# Altium PCB FamicomTwin.PcbDoc
Units mil, origin at the board's own origin, x right, y up, seen from the top; angles counter-clockwise.
Board outline 2200 x 1525 mil, 2 copper layers (Top Layer, Bottom Layer); 2 components, 36 nets, 80 pads, 0 vias.
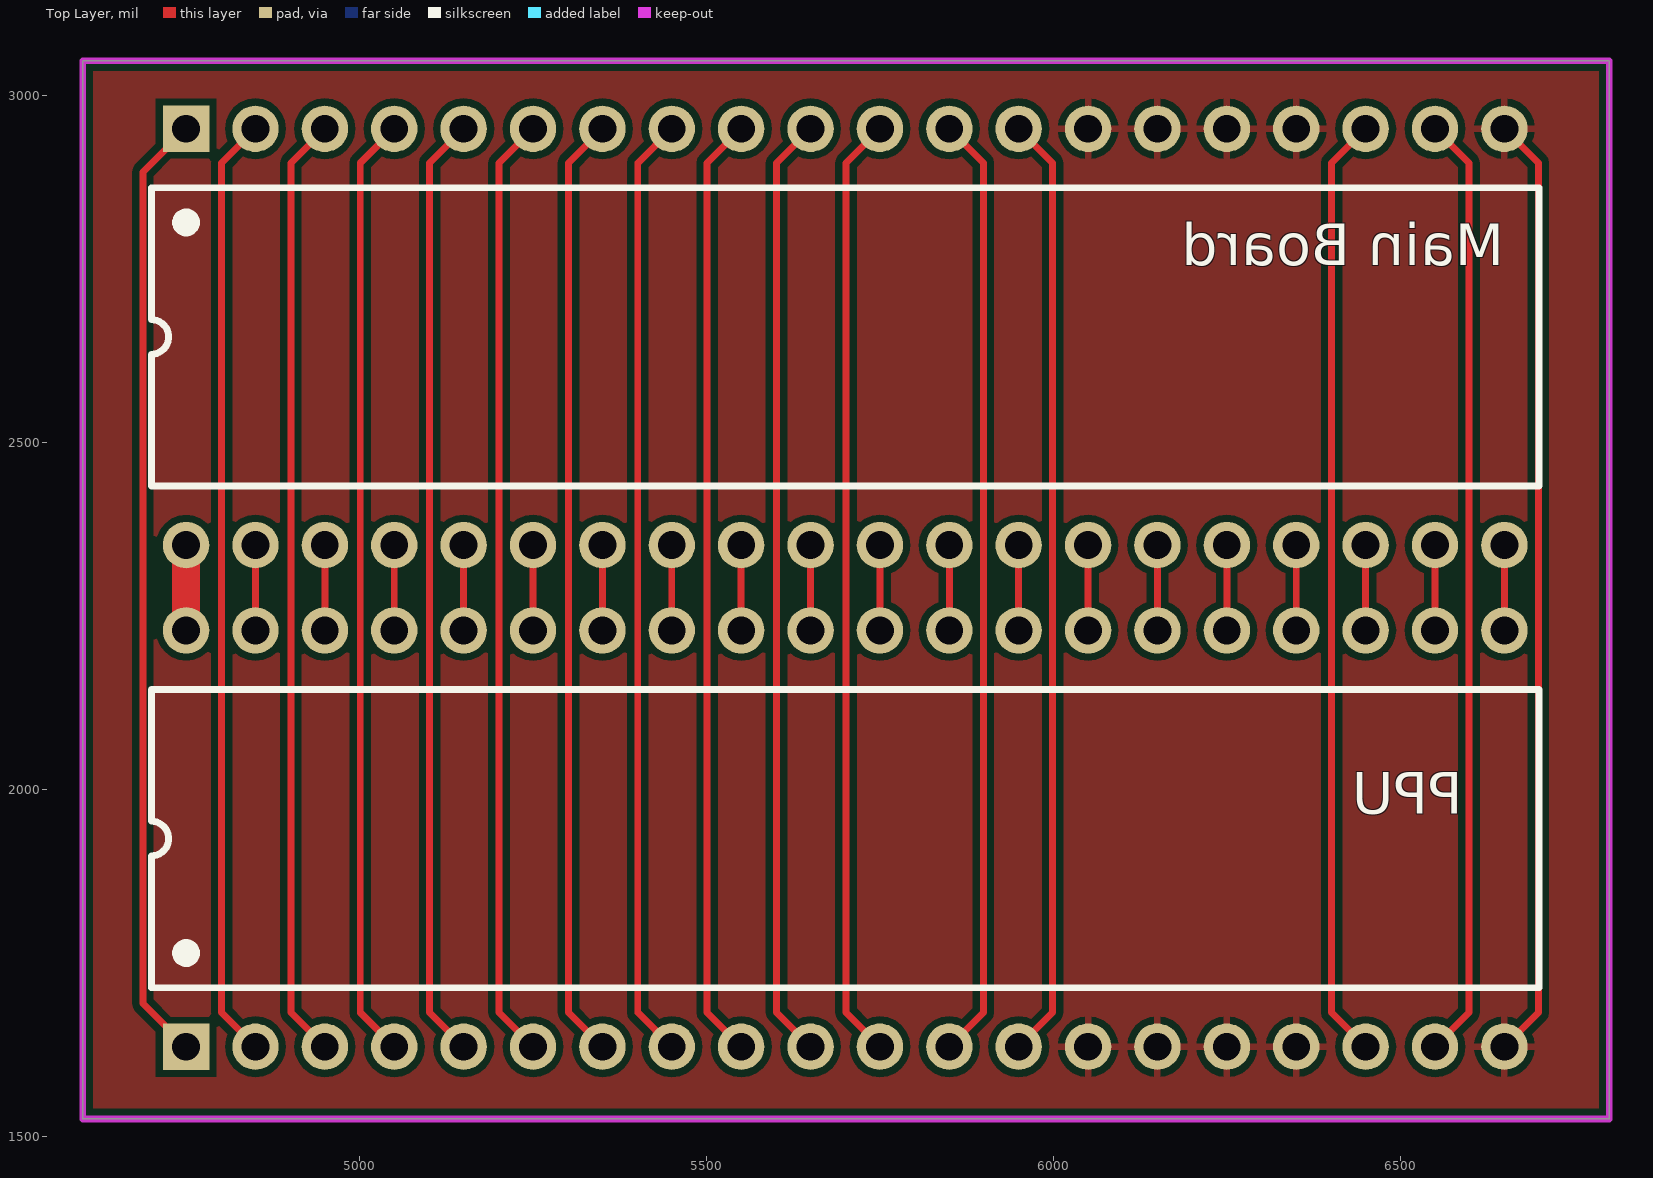
[diagram p0: Top Layer view]
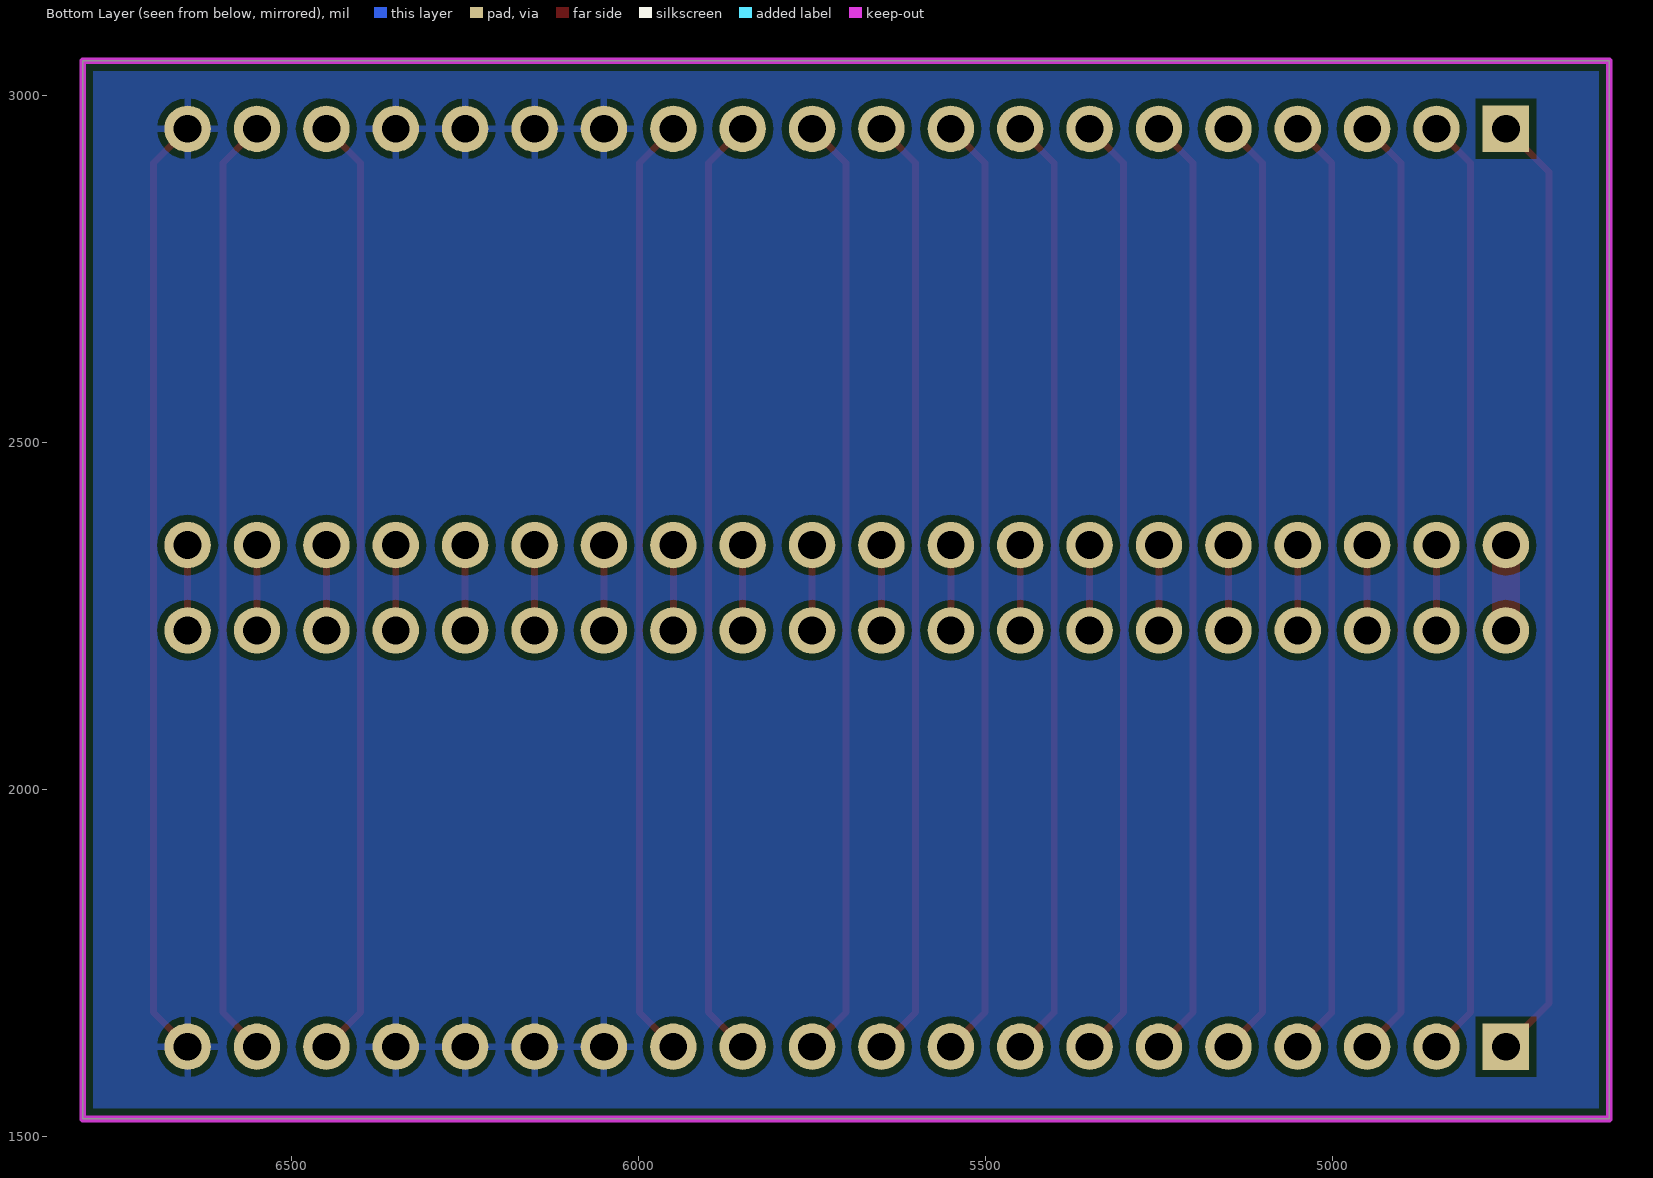
[diagram p1: Bottom Layer view, seen from below]

## Layer stack, top to bottom
Top Solder: solder mask 0.4, Solder Resist, Dk 3.5
Top Layer: signal copper 1.4
Dielectric 1: dielectric 12.6, FR-4, Dk 4.8
Bottom Layer: signal copper 1.4
Bottom Solder: solder mask 0.4, Solder Resist, Dk 3.5

## Board outline
4601.1,1524.93 6801.1,1524.93 6801.1,3049.93 4601.1,3049.93

## Design rules (kind name [scope] priority, off if disabled: settings)
Clearance [All] p1: gap=10 ignorepadtopadclearanceinfootprint=FALSE except(0: Arc-Hole Track-Hole SMDPad-Hole THPad-Hole Via-Hole Fill-Hole Poly-Hole Region-Hole Text-Hole)
PolygonConnect [All] p1: connectstyle=Relief reliefconductorwidth=10 reliefentries=4 polygonreliefangle="90 Angle" airgapwidth=10
RoutingVias [All] p1: holewidth=28 width=50 viastyle="Through Hole" minholewidth=28 minwidth=50 maxholewidth=28 maxwidth=50
SolderMaskExpansion [All] p1: expansion=4 istentingtop=FALSE
Width [All] p1: maxlimit=10 minlimit=10 preferedwidth=10
30 further rules are at their usual default settings.

## Components (designator, comment, footprint, x,y, rotation, side; value= is the part's Value field where it differs from the comment)
"Main Board" "PPU" DIP40-new#1 5825,2671.91 r270 top
PPU "PPU" DIP40-new#2 5825,1908.94 r90 top

## Footprints (in the part's own frame and the unit in brackets; to place one, negate y for a bottom-side part, rotate by r counter-clockwise, add the part's x,y. Pads: shape width x height; smd on the part's side, far side on the other; paste and mask are expansions set on the pad)
DIP40-new#1 [mil]
  rect 66.93x66.93 hole 40: 1(-280,-1075)
  round 66.93 hole 40: 2(-280,-975) 3(-280,-875) 4(-280,-775) 5(-280,-675) 6(-280,-575) 7(-280,-475) 8(-280,-375) 9(-280,-275) 10(-280,-175) 11(-280,-75) 12(-280,25) 13(-280,125) 14(-280,225) 15(-280,325) 16(-280,425) 17(-280,525) 18(-280,625) 19(-280,725) 20(-280,825) 21(320,825) 22(320,725) 23(320,625) 24(320,525) 25(320,425) 26(320,325) 27(320,225) 28(320,125) 29(320,25) 30(320,-75) 31(320,-175) 32(320,-275) 33(320,-375) 34(320,-475) 35(320,-575) 36(320,-675) 37(320,-775) 38(320,-875) 39(320,-975) 40(320,-1075)
  silkscreen extent -195,-1125 235,875
DIP40-new#2 [mil]
  rect 66.93x66.93 hole 40: 1(-280,1075)
  round 66.93 hole 40: 2(-280,975) 3(-280,875) 4(-280,775) 5(-280,675) 6(-280,575) 7(-280,475) 8(-280,375) 9(-280,275) 10(-280,175) 11(-280,75) 12(-280,-25) 13(-280,-125) 14(-280,-225) 15(-280,-325) 16(-280,-425) 17(-280,-525) 18(-280,-625) 19(-280,-725) 20(-280,-825) 21(320,-825) 22(320,-725) 23(320,-625) 24(320,-525) 25(320,-425) 26(320,-325) 27(320,-225) 28(320,-125) 29(320,-25) 30(320,75) 31(320,175) 32(320,275) 33(320,375) 34(320,475) 35(320,575) 36(320,675) 37(320,775) 38(320,875) 39(320,975) 40(320,1075)
  silkscreen extent -195,-875 235,1125

## Part data
"Main Board" PPU: library part UMC6528

## Nets (pads, with @x,y where several pads share a name; then routed paths per layer and width w, separated by ;. In a path a pad name is that pad's centre, name@x,y a point inside that pad or via, vN(x,y) a via of type N, cw(c..) or ccw(c..) an arc to the next point about the centre after c; other vN are vias at no path point)
A0: "Main Board.12" PPU.12 | length 1363.6
  Top Layer w10: PPU.12 5899,1677.94 5899,2902.91 5850,2951.91
A1: "Main Board.11" PPU.11 | length 1363.6
  Top Layer w10: PPU.11 5701,1677.94 5701,2902.91 5750,2951.91
A2: "Main Board.10" PPU.10 | length 1363.6
  Top Layer w10: PPU.10 5601,1677.94 5601,2902.91 5650,2951.91
CLK: "Main Board.18" PPU.18 | length 1363.6
  Top Layer w10: PPU.18 6401,1677.94 6401,2902.91 6450,2951.91
D0: "Main Board.2" PPU.2 | length 1363.6
  Top Layer w10: PPU.2 4801,1677.94 4801,2902.91 4850,2951.91
D1: "Main Board.3" PPU.3 | length 1363.6
  Top Layer w10: PPU.3 4901,1677.94 4901,2902.91 4950,2951.91
D2: "Main Board.4" PPU.4 | length 1363.6
  Top Layer w10: PPU.4 5001,1677.94 5001,2902.91 5050,2951.91
D3: "Main Board.5" PPU.5 | length 1363.6
  Top Layer w10: PPU.5 5101,1677.94 5101,2902.91 5150,2951.91
D4: "Main Board.6" PPU.6 | length 1363.6
  Top Layer w10: PPU.6 5201,1677.94 5201,2902.91 5250,2951.91
D5: "Main Board.7" PPU.7 | length 1363.6
  Top Layer w10: PPU.7 5301,1677.94 5301,2902.91 5350,2951.91
D6: "Main Board.8" PPU.8 | length 1363.6
  Top Layer w10: PPU.8 5401,1677.94 5401,2902.91 5450,2951.91
D7: "Main Board.9" PPU.9 | length 1363.6
  Top Layer w10: PPU.9 5501,1677.94 5501,2902.91 5550,2951.91
DBE: "Main Board.13" PPU.13 | length 1363.6
  Top Layer w10: PPU.13 5999,1677.94 5999,2902.91 5950,2951.91
GND: "Main Board.14" "Main Board.15" "Main Board.16" "Main Board.17" "Main Board.20" PPU.14 PPU.15 PPU.16 PPU.17 PPU.20 | length 1363.6
  Top Layer w10: PPU.20 6699,1677.94 6699,2902.91 6650,2951.91
"NetMain Board_21": "Main Board.21" PPU.21 | length 123
  Top Layer w10: PPU.21 6650,2351.91
"NetMain Board_22": "Main Board.22" PPU.22 | length 123
  Top Layer w10: PPU.22 6550,2351.91
"NetMain Board_23": "Main Board.23" PPU.23 | length 123
  Top Layer w10: PPU.23 6450,2351.91
"NetMain Board_24": "Main Board.24" PPU.24 | length 123
  Top Layer w10: PPU.24 6350,2351.91
"NetMain Board_25": "Main Board.25" PPU.25 | length 123
  Top Layer w10: PPU.25 6250,2351.91
"NetMain Board_26": "Main Board.26" PPU.26 | length 123
  Top Layer w10: PPU.26 6150,2351.91
"NetMain Board_27": "Main Board.27" PPU.27 | length 123
  Top Layer w10: PPU.27 6050,2351.91
"NetMain Board_28": "Main Board.28" PPU.28 | length 123
  Top Layer w10: PPU.28 5950,2351.91
"NetMain Board_29": "Main Board.29" PPU.29 | length 123
  Top Layer w10: PPU.29 5850,2351.91
"NetMain Board_30": "Main Board.30" PPU.30 | length 123
  Top Layer w10: PPU.30 5750,2351.91
"NetMain Board_31": "Main Board.31" PPU.31 | length 123
  Top Layer w10: PPU.31 5650,2351.91
"NetMain Board_32": "Main Board.32" PPU.32 | length 123
  Top Layer w10: PPU.32 5550,2351.91
"NetMain Board_33": "Main Board.33" PPU.33 | length 123
  Top Layer w10: PPU.33 5450,2351.91
"NetMain Board_34": "Main Board.34" PPU.34 | length 123
  Top Layer w10: PPU.34 5350,2351.91
"NetMain Board_35": "Main Board.35" PPU.35 | length 123
  Top Layer w10: PPU.35 5250,2351.91
"NetMain Board_36": "Main Board.36" PPU.36 | length 123
  Top Layer w10: PPU.36 5150,2351.91
"NetMain Board_37": "Main Board.37" PPU.37 | length 123
  Top Layer w10: PPU.37 5050,2351.91
"NetMain Board_38": "Main Board.38" PPU.38 | length 123
  Top Layer w10: PPU.38 4950,2351.91
"NetMain Board_39": "Main Board.39" PPU.39 | length 123
  Top Layer w10: PPU.39 4850,2351.91
"NetMain Board_40": "Main Board.40" PPU.40 | length 123
  Top Layer w40: PPU.40 4750,2351.91
NMI: "Main Board.19" PPU.19 | length 1363.6
  Top Layer w10: PPU.19 6599,1677.94 6599,2902.91 6550,2951.91
R/W: "Main Board.1" PPU.1 | length 1374.5
  Top Layer w10: PPU.1 4687.76,1691.19 4687.76,2889.67 4750,2951.91

## Polygon pours and split planes (outlines as drawn)
GND on Bottom Layer "GND_L02_P000" (solid, pour order 0): 4601.1,1524.93 6801.1,1524.93 6801.1,3049.93 4601.1,3049.93
GND on Top Layer "GND_L01_P001" (solid, pour order 1): 4601.1,1524.93 6801.1,1524.93 6801.1,3049.93 4601.1,3049.93

## Keep-outs
Keep-Out Layer:
  the board outline again, w10